# Altium PCB PX4FMUv2.4.6.PcbDoc (part 2 of 3)
Units mil, origin at the board's own origin, x right, y up, seen from the top; angles counter-clockwise.
Board outline 2756 x 1595 mil, 6 copper layers (Top, Ground, Horizontal, Vertical, Power, Bottom), stack 65.355 mil thick; 292 components, 264 nets, 1164 pads, 473 vias.
Unrouted connection lines stored in the file: 12.
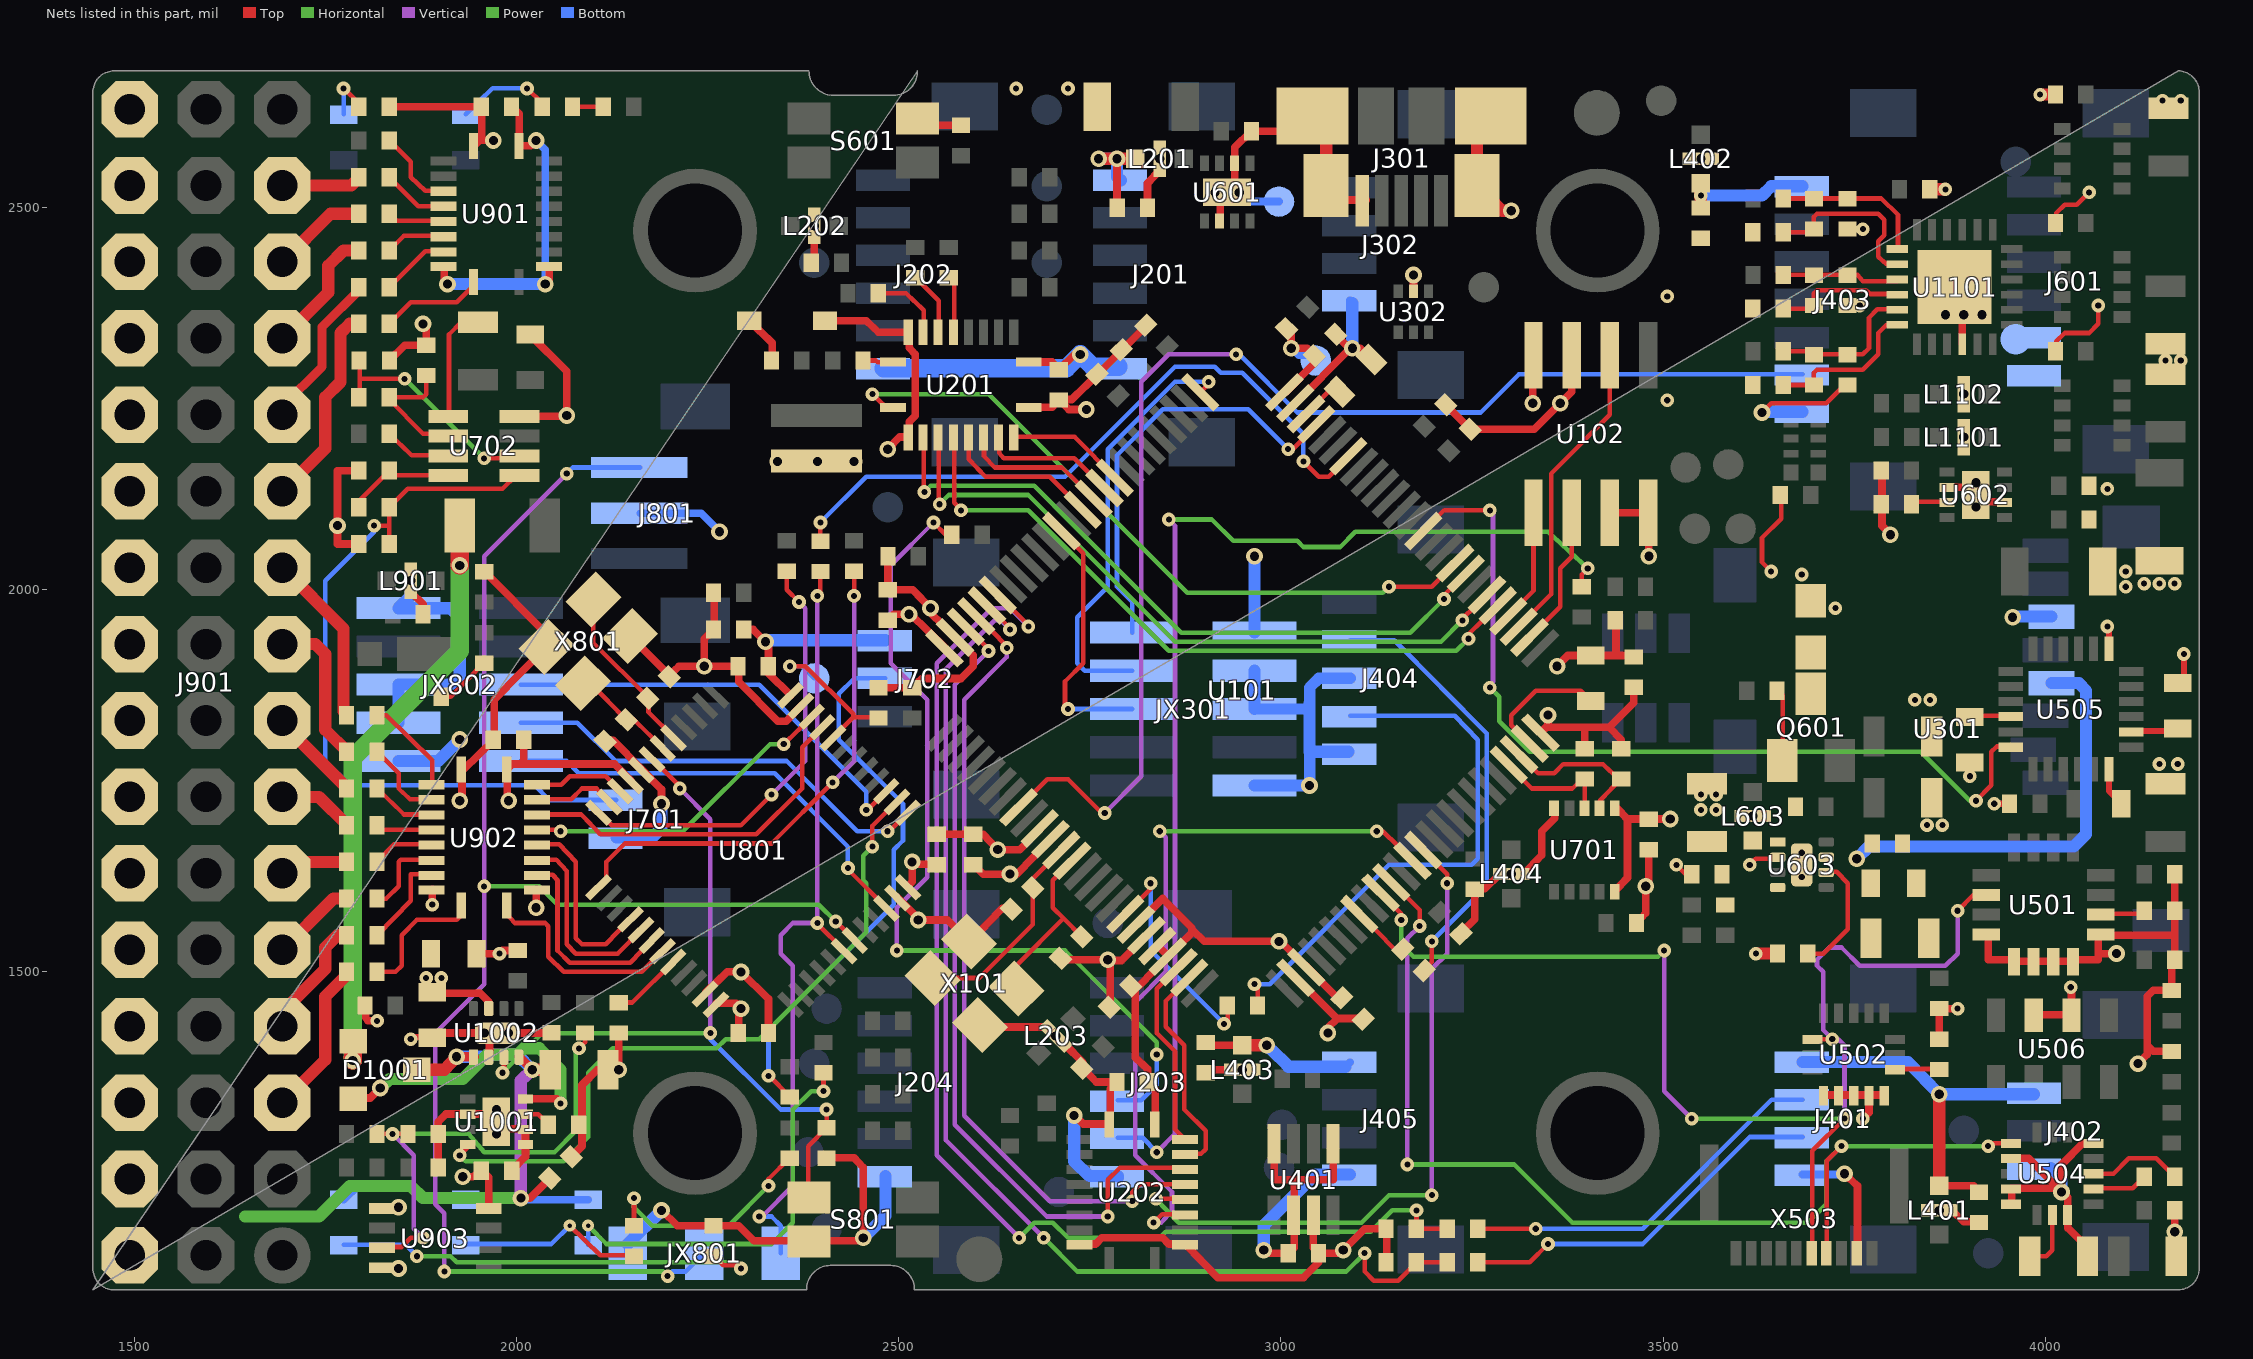
[diagram p6: the nets of this part, all layers, seen from the top]

## Via types
v1: diameter 17.84/17.84/17.84/17.84/17.84/17.84 (per signal layer), hole 8, Top to Bottom, 334 vias
v2: diameter 21.84/21.84/21.84/21.84/21.84/21.84 (per signal layer), hole 12, Top to Bottom, 129 vias
v3: diameter 15.84/15.84/15.84/15.84/15.84/15.84 (per signal layer), hole 6, Top to Bottom, 8 vias
v4: diameter 19.84/19.84/19.84/19.84/19.84/19.84 (per signal layer), hole 10, Top to Bottom, 2 vias

## Nets (pads, with @x,y where several pads share a name; then routed paths per layer and width w, separated by ;. In a path a pad name is that pad's centre, name@x,y a point inside that pad or via, vN(x,y) a via of type N, cw(c..) or ccw(c..) an arc to the next point about the centre after c; other vN are vias at no path point) (continued)
FMU-CH6-PROT: J901.31 R902.P$2 | length 268.5
  Top w16: J901.31@1693.4,2128.37 1749.4,2184.37 1749.4,2251.37 1769.4,2271.37 1769.4,2335.37 1781.4,2347.37 R902.P$2@1794.4,2347.37
FMU-I2C1_SCL: R401.P$1 R404.P$1 U101.95 | length 1631.5
  Top w6: U101.95@2629.4,1993.37 2669.4,1953.37 v1(2669.4,1951.37) ; v1(3177.4,1187.37) 3177.4,1163.37 R404.P$1@3218.4,1163.37
  Horizontal w6: v1(2657.4,1151.37) 2677.4,1171.37 2701.4,1171.37 2721.4,1151.37 2841.4,1151.37 2849.4,1159.37 3117.4,1159.37 3145.4,1187.37 v1(3177.4,1187.37)
  Vertical w6: v1(2657.4,1151.37) 2549.4,1259.37 2549.4,1903.37 2621.4,1975.37 2645.4,1975.37 v1(2669.4,1951.37)
FMU-I2C1_SDA: R402.P$1 R405.P$1 U101.96 | length 1553
  Top w6: U101.96@2615.4,1979.37 2645.4,1949.37 v1(2645.4,1947.37) ; v1(3109.4,1131.37) 3109.4,1107.37 3121.4,1095.37 3153.4,1095.37 3177.4,1119.37 R405.P$1@3218.4,1119.37
  Horizontal w6: v1(2689.4,1151.37) 2733.4,1107.37 3085.4,1107.37 v1(3109.4,1131.37)
  Vertical w6: v1(2645.4,1947.37) 2633.4,1959.37 2625.4,1959.37 2561.4,1895.37 2561.4,1279.37 v1(2689.4,1151.37)
FMU-I2C2_SCL: R306.P$1 U101.47 U701.3 | length 156.2
  Top w6: U101.47@3297.4,1770.37 3328.4,1739.37 3381.4,1739.37 3394.4,1752.37 3397.4,1752.37 U701.3@3397.4,1714.37
FMU-I2C2_SDA: R307.P$1 U101.48 U701.2 | length 206.2
  Top w6: U101.48@3311.4,1784.37 3336.4,1759.37 3357.4,1759.37 3369.4,1771.37 3421.4,1771.37 3441.4,1752.37 3445.4,1752.37 3417.4,1723.37 U701.2@3417.4,1714.37
FMU-SWCLK: JX301.4 U101.76 | length 559.4
  Top w6: U101.76@2894.4,2257.37 2905.4,2269.37 v1(2905.4,2271.37)
  Bottom w6: JX301.4@2805.4,1893.37 2743.4,1893.37 2733.4,1903.37 2733.4,1963.37 2773.4,2003.37 2773.4,2183.37 2861.4,2271.37 v1(2905.4,2271.37)
FMU-SWDIO: JX301.2 U101.72 | length 561.9
  Top w6: v1(3009.4,2183.37) 3015.4,2183.37 U101.72@3047.4,2215.37
  Bottom w6: JX301.2@2805.4,1943.37 2805.4,1983.37 2785.4,2003.37 2785.4,2175.37 2845.4,2235.37 2957.4,2235.37 v1(3009.4,2183.37)
FMU-SWO: JX301.6 U101.89 | length 339.9
  Top w6: U101.89@2713.4,2076.37 2741.4,2047.37 2741.4,1903.37 2717.4,1879.37 2717.4,1847.37 v1(2721.4,1843.37)
  Bottom w6: v1(2721.4,1843.37) JX301.6@2805.4,1843.37
FMU-UART4_RX: U101.24 U202.8 | length 288.9
  Top w6: U202.8@2874.4,1261.37 2895.4,1261.37 2901.4,1267.37 2901.4,1291.37 2873.4,1319.37 2873.4,1403.37 2849.4,1427.37 2849.4,1461.37 U101.24@2880.4,1492.37
FMU-UART4_TX: U101.23 U202.9 | length 253.3
  Top w6: U101.23@2866.4,1506.37 2837.4,1477.37 2837.4,1419.37 2861.4,1395.37 2861.4,1293.37 U202.9@2874.4,1280.37
FMU-UART7_RX: U101.38 U202.4 | length 959.3
  Top w6: v1(2833.4,1171.37) 2844.4,1182.37 U202.4@2874.4,1182.37 ; v1(3125.4,1683.37) 3133.4,1683.37 U101.38@3172.4,1645.37
  Horizontal w6: v1(2841.4,1683.37) v1(3125.4,1683.37)
  Vertical w6: v1(2833.4,1171.37) 2843.4,1171.37 2857.4,1186.37 2857.4,1211.37 2809.4,1259.37 2809.4,1459.37 2849.4,1499.37 2849.4,1675.37 v1(2841.4,1683.37)
FMU-UART7_TX: U101.39 U202.5 | length 901.9
  Top w6: v1(2836.4,1202.37) U202.5@2874.4,1202.37 ; U101.39@3185.4,1660.37 3185.4,1659.37 3186.4,1659.37 3217.4,1627.37 v1(3217.4,1615.37)
  Horizontal w6: v1(2836.4,1202.37) 2866.4,1171.37 3105.4,1171.37 3141.4,1207.37 v1(3197.4,1207.37)
  Vertical w6: v1(3197.4,1207.37) 3197.4,1503.37 3217.4,1523.37 v1(3217.4,1615.37)
FMU-UART8_RX: U101.97 U202.6 | length 1044.6
  Top w6: U101.97@2602.4,1965.37 2641.4,1925.37 v1(2641.4,1923.37) ; v1(2805.4,1199.37) 2805.4,1211.37 2815.4,1221.37 U202.6@2874.4,1221.37
  Vertical w6: v1(2641.4,1923.37) 2641.4,1911.37 2585.4,1855.37 2585.4,1311.37 2697.4,1199.37 v1(2805.4,1199.37)
FMU-UART8_TX: U101.98 U202.7 | length 1088.1
  Top w6: U101.98@2588.4,1951.37 2617.4,1921.37 v1(2617.4,1919.37) ; v1(2773.4,1179.37) 2773.4,1227.37 2789.4,1243.37 2872.4,1243.37 U202.7@2874.4,1241.37
  Vertical w6: v1(2617.4,1919.37) 2573.4,1875.37 2573.4,1299.37 2693.4,1179.37 v1(2773.4,1179.37)
FMU-USART2_CTS: U101.84 U201.9 | length 154.2
  Top w6: U201.9@2650.4,2199.37 2730.4,2199.37 U101.84@2782.4,2146.37
FMU-USART2_RTS: U101.85 U201.8 | length 178.1
  Top w6: U201.8@2631.4,2199.37 2631.4,2178.37 2637.4,2171.37 2729.4,2171.37 U101.85@2769.4,2132.37
FMU-USART2_RX: U101.87 U201.6 | length 206.4
  Top w6: U201.6@2591.4,2199.37 2591.4,2170.37 2613.4,2147.37 2697.4,2147.37 U101.87@2741.4,2104.37
FMU-USART2_TX: U101.86 U201.7 | length 192.2
  Top w6: U201.7@2611.4,2199.37 2611.4,2174.37 2625.4,2159.37 2713.4,2159.37 U101.86@2755.4,2118.37
FMU-USART3_CTS: U101.58 U201.3 | length 899.3
  Top w6: U201.3@2532.4,2199.37 2532.4,2129.37 v1(2533.4,2127.37) ; v1(3213.4,1987.37) 3213.4,1992.37 U101.58@3242.4,2021.37
  Horizontal w6: v1(2533.4,2127.37) 2541.4,2135.37 2677.4,2135.37 2869.4,1943.37 3169.4,1943.37 v1(3213.4,1987.37)
FMU-USART3_RTS: U101.59 U201.1 | length 922.3
  Top w6: v1(2465.4,2255.37) 2483.4,2238.37 U201.1@2493.4,2238.37 ; v1(3141.4,2003.37) 3197.4,2003.37 U101.59@3228.4,2035.37
  Horizontal w6: v1(2465.4,2255.37) 2617.4,2255.37 2877.4,1995.37 3133.4,1995.37 v1(3141.4,2003.37)
FMU-USART3_RX: U101.56 U201.4 | length 916.3
  Top w6: U201.4@2552.4,2199.37 2552.4,2113.37 v1(2553.4,2111.37) ; v1(3237.4,1959.37) 3237.4,1961.37 U101.56@3270.4,1993.37
  Horizontal w6: v1(2553.4,2111.37) 2565.4,2123.37 2669.4,2123.37 2861.4,1931.37 3209.4,1931.37 v1(3237.4,1959.37)
FMU-USART3_TX: U101.55 U201.5 | length 906.7
  Top w6: U201.5@2572.4,2199.37 2572.4,2113.37 v1(2581.4,2103.37) ; v1(3245.4,1935.37) 3245.4,1941.37 U101.55@3284.4,1979.37
  Horizontal w6: v1(2581.4,2103.37) 2669.4,2103.37 2853.4,1919.37 3229.4,1919.37 v1(3245.4,1935.37)
FMU-VDD_3V3: C101.P$1 C201.P$1 C202.P$1 C402.P$1 C603.P$1 C604.P$1 C606.P$1 C607.P$1 C608.P$1 C610.P$1 C612.P$1 C616.P$1 C701.P$1 C902.P$1 D602.A JX301.1 R301.P$2 R302.P$2 R303.P$2 R304.P$2 R305.P$2 R306.P$2 R307.P$2 R401.P$2 R402.P$2 R602.P$2 R604.P$2 U101.11 U101.19 U101.21 U101.22 U101.28 U101.50 U101.75 U101.100 U102.3 U102.7 U102.8 U201.2 U201.10 U201.19 U202.2 U202.10 U202.19 U301.4 U401.3 U603.7 U701.1 U701.10 U901.2 U901.10 U901.19 VDD_3V1101.P$1 | length 4153.1
  Top w6: v1(3641.4,2023.37) 3629.4,2035.37 3629.4,2067.37 3654.4,2092.37 R604.P$2@3654.4,2123.37
  Top w10: U901.19@1905.4,2423.37 1905.4,2404.37 v2(1909.4,2399.37) ; C902.P$1@1993.4,2631.37 2003.4,2622.37 2003.4,2580.37 2018.4,2580.37 v2(2025.4,2587.37) ; v2(2037.4,2399.37) 2042.4,2404.37 2042.4,2423.37 U901.2@2041.4,2423.37 ; D602.A@2403.4,2351.37 2457.4,2351.37 2473.4,2336.37 2513.4,2336.37 2513.4,2316.37 2521.4,2307.37 2521.4,2227.37 2513.4,2219.37 2513.4,2199.37 2501.4,2199.37 v2(2485.4,2183.37) ; C608.P$1@2485.4,1960.37 2493.4,1967.37 v2(2513.4,1967.37) 2515.4,1967.37 U101.100@2560.4,1923.37 ; C610.P$1@2597.4,1640.37 2610.4,1627.37 v2(2645.4,1627.37) 2654.4,1627.37 U101.11@2699.4,1673.37 ; U201.10@2670.4,2238.37 2700.4,2238.37 C201.P$1@2709.4,2248.37 ; U202.19@2737.4,1143.37 2757.4,1143.37 2765.4,1151.37 2845.4,1151.37 2853.4,1143.37 2873.4,1143.37 2874.4,1143.37 2917.4,1099.37 3029.4,1099.37 3049.4,1119.37 C402.P$1@3049.4,1131.37 ; v2(2745.4,2235.37) 2722.4,2235.37 C201.P$1@2709.4,2248.37 ; U101.19@2810.4,1561.37 2845.4,1595.37 2883.4,1557.37 2883.4,1550.37 ; R301.P$2@2824.4,2345.37 2792.4,2313.37 2760.4,2281.37 2726.4,2248.37 C201.P$1@2709.4,2248.37 ; U202.10@2835.4,1300.37 2835.4,1346.37 2825.4,1355.37 2825.4,1372.37 2809.4,1387.37 2809.4,1475.37 2803.4,1481.37 2814.4,1481.37 U101.22@2852.4,1520.37 ; U101.21@2838.4,1533.37 U101.22@2852.4,1520.37 ; U101.75@3005.4,2257.37 3044.4,2296.37 3044.4,2306.37 3034.4,2315.37 v2(3013.4,2315.37) 3013.4,2336.37 R602.P$2@3008.4,2342.37 ; U401.3@3042.4,1181.37 3042.4,1138.37 C402.P$1@3049.4,1131.37 ; C101.P$1@3080.4,1465.37 3073.4,1465.37 3033.4,1506.37 2999.4,1539.37 v2(2997.4,1539.37) 2899.4,1539.37 2885.4,1553.37 2883.4,1550.37 ; R402.P$2@3138.4,1119.37 3138.4,1163.37 3109.4,1163.37 v2(3081.4,1135.37) 3077.4,1131.37 C402.P$1@3049.4,1131.37 ; R305.P$2@3215.4,2241.37 3247.4,2209.37 3331.4,2209.37 v2(3365.4,2243.37) 3380.4,2258.37 U102.3@3380.4,2306.37 ; U101.50@3341.4,1812.37 U101.50@3339.4,1812.37 ; v2(3349.4,1835.37) 3349.4,1822.37 U101.50@3339.4,1812.37 ; R306.P$2@3397.4,1791.37 3397.4,1819.37 ; U102.7@3430.4,2100.37 U102.8@3480.4,2100.37 3481.4,2099.37 v2(3481.4,2043.37) ; U701.10@3437.4,1605.37 3453.4,1622.37 3453.4,1699.37 ; U701.1@3437.4,1714.37 3439.4,1714.37 3453.4,1699.37 ; R307.P$2@3445.4,1791.37 3445.4,1803.37 3429.4,1819.37 ; C607.P$1@3461.4,1872.37 3461.4,1851.37 3429.4,1819.37 ; v2(3509.4,1699.37) 3481.4,1699.37 3453.4,1699.37 ; U101.22@2852.4,1520.37 2883.4,1550.37 ; U101.50@3339.4,1812.37 3347.4,1819.37 3397.4,1819.37 ; 3397.4,1819.37 3429.4,1819.37
  Bottom w10: v2(2025.4,2587.37) 2037.4,2575.37 v2(2037.4,2399.37) ; v2(3013.4,2315.37) 3023.4,2306.37 3044.4,2306.37 3045.4,2304.37 VDD_3V1101.P$1@3045.4,2299.37
  Bottom w16: v2(1909.4,2399.37) v2(2037.4,2399.37) ; JX301.1@2965.4,1943.37 v2(2965.4,2043.37) ; v2(3753.4,1647.37) 3769.4,1663.37 4037.4,1663.37 4053.4,1679.37 4053.4,1867.37 4044.4,1877.37 U301.4@4008.4,1877.37
FMU-VDD_5V5: C601.P$1 C615.P$1 L603.P$2 R603.P$1 U603.1 U603.4
FMU_AUX_ADC1: R408.P$1 U101.18 | length 303.5
  Top w6: U101.18@2796.4,1575.37 2829.4,1608.37 v1(2829.4,1615.37) ; v1(2925.4,1431.37) 2930.4,1436.37 R408.P$1@2930.4,1455.37
  Bottom w6: v1(2829.4,1615.37) 2829.4,1527.37 v1(2925.4,1431.37)
FMU_AUX_ADC1_PROT: J404.4 R408.P$2 | length 726.1
  Top w6: v1(2965.4,1483.37) 2969.4,1480.37 R408.P$2@2969.4,1455.37
  Bottom w6: v1(2965.4,1483.37) 2985.4,1483.37 3141.4,1639.37 3249.4,1639.37 3257.4,1647.37 3257.4,1803.37 3227.4,1834.37 J404.4@3090.4,1834.37
FMU_AUX_ADC2: R407.P$1 U101.33 | length 76.4
  Top w6: U101.33@3103.4,1575.37 3148.4,1529.37 R407.P$1@3160.4,1529.37
FMU_AUX_ADC2_PROT: J404.2 R407.P$2 | length 576.4
  Top w6: R407.P$2@3189.4,1499.37 3187.4,1502.37 3197.4,1512.37 v1(3197.4,1539.37)
  Bottom w6: J404.2@3090.4,1933.37 3148.4,1933.37 3269.4,1811.37 3269.4,1611.37 v1(3197.4,1539.37)
FRAM_MISO: U101.53 U102.2 | length 404.3
  Top w6: U101.53@3311.4,1951.37 3353.4,1993.37 3353.4,2151.37 3430.4,2228.37 U102.2@3430.4,2306.37
FRAM_MOSI: U101.54 U102.5 | length 148.7
  Top w6: U101.54@3297.4,1965.37 3330.4,1998.37 U102.5@3330.4,2100.37
FRAM_SCK: U101.52 U102.6 | length 185.8
  Top w6: U101.52@3325.4,1937.37 3365.4,1977.37 3365.4,2027.37 3380.4,2042.37 U102.6@3380.4,2100.37
GND: B601.2 C101.P$2 C102.P$2 C103.P$1 C201.P$2 C202.P$2 C401.P$2 C402.P$2 C501.P$2 C502.P$2 C503.P$2 C504.P$2 C505.P$2 C506.P$2 C507.P$2 C508.P$2 C509.P$2 C511.P$2 C512.P$2 C513.P$2 C514.P$2 C515.P$2 C601.P$2 C602.P$1 C603.P$2 C604.P$2 C605.P$2 C606.P$2 C607.P$2 C608.P$2 C609.P$1 C610.P$2 C611.P$2 C612.P$2 C613.P$2 C614.P$2 C615.P$2 C616.P$2 C617.P$2 C618.P$2 C701.P$2 C702.P$2 C703.P$2 C704.P$2 C801.P$1 C802.P$2 C803.P$2 C804.P$2 C805.P$2 C806.P$1 C901.P$2 C902.P$2 C903.P$2 C1001.P$2 C1002.P$2 C1003.P$2 C1004.P$2 C1005.P$2 C1008.P$2 C1101.P$2 C1102.P$2 C1103.P$2 C1104.P$2 C1105.P$2 C1106.P$2 C1107.P$2 C1108.P$2 C1109.P$2 C1110.P$2 D201.A D202.A D203.A D401.A D402.A D403.A D404.A D701.A D801.A D901.A D902.A D903.A GND..P$1 GND.P$1 J201.6 J202.6 J203.6 J204.6 J301.GND J301.GND1 J301.GND2 J301.GND3 J301.GND4 J302.4 J401.4 J402.3 J403.7 J404.3 J404.5 J405.4 J601.5 J601.6 J701.2 J801.P$2 J901.3 J901.6 J901.9 J901.12 J901.15 J901.18 J901.21 J901.24 J901.27 J901.30 J901.33 J901.36 J901.39 J901.42 J901.45 J901.48 JX301.3 JX301.5 JX301.9 JX801.3 JX802.3 JX802.5 JX802.9 L201.P$3 L201.P$4 L201.P$5 L202.P$3 L202.P$4 L202.P$5 L203.P$3 L203.P$4 L203.P$5 L401.P$3 L401.P$4 L401.P$5 L402.P$3 L402.P$4 L402.P$5 L403.P$3 L403.P$4 L403.P$5 L404.P$3 L404.P$4 L404.P$5 L603.P$3 L603.P$4 L603.P$5 L901.P$3 L901.P$4 L901.P$5 L1101.P$3 L1101.P$4 L1101.P$5 L1102.P$3 L1102.P$4 L1102.P$5 R102.P$2 R403.P$1 R610.P$2 R611.P$1 R615.P$2 R616.P$2 R617.P$2 R621.1 R702.P$2 R704.P$1 R706.P$2 R708.P$1 R711.P$1 R713.P$2 R801.P$2 R802.P$2 R919.P$1 R1001.P$1 R1002.P$1 R1103.P$2 R1104.P$2 R1107.P$2 R1111.P$2 R1114.P$2 R1115.P$1 S601.B3 S801.B3 U101.10 U101.20 U101.27 U101.74 U101.99 U102.4 U201.11 U202.11 U301.6 U302.2 U401.2 U401.5 U401.8 U501.8 U501.9 U501.10 U501.11 U501.12 U501.13 U502.9 U502.10 U502.11 U502.12 U502.13 U504.5 U504.10 U504.12 U504.13 U504.16 U505.1 U505.18 U506.2 U506.3 U601.2 U601.6 U601.GND U601.P$2 U601.P$3 U602.2 U602.6 U602.GND U602.P$2 U602.P$3 U603.2 U603.GND U701.5 U702.4 U801.8 U801.23 U801.35 U801.47 U901.11 U902.11 U903.1 U903.4 U1001.2 U1001.5 U1001.6 U1001.GND U1001.P$2 U1001.P$3 U1002.2 U1002.GND U1101.P$10 U1101.P$25 X101.2 X101.4 X503.2 X801.2 X801.4 | length 11031.7
  Top w6: v1(3517.4,1639.37) 3529.4,1627.37 C615.P$2@3538.4,1627.37 ; L402.P$3@3534.4,2563.37 L402.P$5@3549.4,2563.37 L402.P$4@3565.4,2563.37 ; v1(3613.4,1639.37) 3621.4,1647.37 3648.4,1647.37 U603.2@3650.4,1649.37 ; v2(3629.4,2231.37) 3641.4,2243.37 3713.4,2243.37 3738.4,2268.37 C1110.P$2@3741.4,2268.37 ; C1109.P$2@3741.4,2372.37 3757.4,2372.37 v1(3757.4,2371.37) ; C1108.P$2@3741.4,2472.37 3761.4,2472.37 v1(3761.4,2471.37) ; L1102.P$4@3893.4,2240.37 L1102.P$5@3893.4,2255.37 L1102.P$3@3893.4,2271.37 ; C1107.P$2@4014.4,2311.37 4014.4,2324.37 4025.4,2335.37 4057.4,2335.37 4069.4,2347.37 v1(4069.4,2371.37) ; C1106.P$2@4014.4,2479.37 4014.4,2492.37 4025.4,2503.37 4041.4,2503.37 v1(4057.4,2519.37) ; C1101.P$2@4161.4,2629.37 4167.4,2629.37 v1(4177.4,2639.37)
  Top w8: v1(1861.4,1411.37) 1864.4,1414.37 C1003.P$2@1889.4,1414.37 ; v1(3901.4,1755.37) C512.P$2@3901.4,1774.37 ; v1(3933.4,1719.37) C514.P$2@3954.4,1719.37 ; v1(4081.4,1951.37) 4083.4,1950.37 U505.1@4083.4,1922.37 ; U505.18@4083.4,1765.37 4083.4,1736.37 C513.P$2@4099.4,1719.37 ; C515.P$2@4173.4,1877.37 4171.4,1877.37 4181.4,1887.37 v1(4181.4,1915.37)
  Top w10: C703.P$2@1794.4,2059.37 1765.4,2059.37 v2(1765.4,2083.37) 1765.4,2155.37 R702.P$2@1794.4,2155.37 ; C1008.P$2@1802.4,1455.37 1802.4,1439.37 1805.4,1435.37 v1(1817.4,1435.37) ; U903.4@1824.4,1113.37 1844.4,1113.37 v2(1845.4,1111.37) ; U903.1@1824.4,1190.37 1844.4,1190.37 v2(1845.4,1191.37) ; R706.P$2@1833.4,2299.37 1853.4,2319.37 C704.P$2@1881.4,2319.37 1881.4,2343.37 v2(1877.4,2347.37) ; R711.P$1@1833.4,2631.37 1954.4,2631.37 1954.4,2590.37 1944.4,2580.37 1951.4,2587.37 v2(1969.4,2587.37) ; L901.P$4@1861.4,2027.37 L901.P$5@1861.4,2011.37 1861.4,1996.37 1877.4,1980.37 D903.A@1877.4,1967.37 ; C1003.P$2@1889.4,1414.37 1895.4,1419.37 v2(1957.4,1419.37) 1964.4,1413.37 U1002.2@1964.4,1388.37 ; D901.A@1897.4,1243.37 D902.A@1897.4,1287.37 1897.4,1303.37 1907.4,1313.37 1936.4,1313.37 U1001.GND@1968.4,1313.37 ; v2(1925.4,1723.37) 1928.4,1726.37 1928.4,1764.37 1930.4,1764.37 1970.4,1803.37 1970.4,1855.37 2039.4,1925.37 2039.4,1941.37 R919.P$1@1957.4,2023.37 ; C1004.P$2@1947.4,1523.37 v1(1977.4,1523.37) 1981.4,1527.37 C1002.P$2@2001.4,1527.37 ; U1001.GND@1973.4,1288.37 1979.4,1294.37 2011.4,1294.37 2011.4,1274.37 2011.4,1257.37 C901.P$2@1993.4,1239.37 ; U1001.GND@1973.4,1303.37 U1001.GND@1968.4,1313.37 ; U1001.GND@1973.4,1319.37 U1001.GND@1968.4,1313.37 ; v2(1989.4,1419.37) 2045.4,1419.37 R1002.P$1@2045.4,1420.37 ; U702.4@2004.4,2226.37 2064.4,2226.37 v2(2065.4,2227.37) 2065.4,2285.37 C702.P$2@2017.4,2333.37 ; C1005.P$2@2071.4,1257.37 2085.4,1271.37 R1001.P$1@2085.4,1303.37 ; R1001.P$1@2081.4,1299.37 R1001.P$1@2085.4,1303.37 ; C806.P$1@2116.4,1802.37 2126.4,1802.37 2163.4,1764.37 2189.4,1738.37 v2(2189.4,1719.37) ; C1001.P$2@2129.4,1371.37 2105.4,1371.37 2085.4,1351.37 R1001.P$1@2085.4,1303.37 ; v2@2133.4,1370.37 v2(2133.4,1371.37) R802.P$2@2133.4,1420.37 ; X801.2@2148.4,1938.37 C805.P$2@2199.4,1887.37 ; v2(2189.4,1187.37) 2210.4,1167.37 2257.4,1167.37 2290.4,1167.37 2310.4,1147.37 2383.4,1147.37 2449.4,1147.37 v2(2453.4,1151.37) 2453.4,1243.37 2441.4,1256.37 C801.P$1@2405.4,1256.37 ; C805.P$2@2199.4,1885.37 C805.P$2@2199.4,1887.37 ; U801.23@2247.4,1472.37 2275.4,1499.37 v2(2293.4,1499.37) 2329.4,1464.37 C802.P$2@2329.4,1419.37 ; D801.A@2258.4,1995.37 2258.4,1947.37 2245.4,1935.37 v2(2245.4,1899.37) ; C803.P$2@2288.4,1897.37 C803.P$2@2290.4,1899.37 ; U801.47@2372.4,1847.37 2352.4,1827.37 2341.4,1827.37 2290.4,1879.37 C803.P$2@2290.4,1899.37 ; D202.A@2386.4,2427.37 2389.4,2431.37 2389.4,2460.37 L202.P$5@2389.4,2475.37 L202.P$4@2389.4,2491.37 ; B601.2@2392.4,2167.37 v2(2393.4,2167.37) ; R801.P$2@2473.4,1871.37 R713.P$2@2517.4,1871.37 2530.4,1883.37 2581.4,1883.37 2597.4,1899.37 2597.4,1913.37 2574.4,1937.37 2541.4,1969.37 v2(2541.4,1975.37) 2518.4,1999.37 C608.P$2@2485.4,1999.37 2485.4,2043.37 R611.P$1@2486.4,2043.37 ; U801.35@2497.4,1597.37 2525.4,1569.37 v2(2525.4,1567.37) 2563.4,1567.37 2592.4,1538.37 2635.4,1582.37 C102.P$2@2648.4,1582.37 ; S601.B3@2524.4,2616.37 2533.4,2607.37 C609.P$1@2581.4,2607.37 ; C804.P$2@2549.4,1679.37 C610.P$2@2597.4,1679.37 2610.4,1679.37 v2(2629.4,1659.37) 2658.4,1659.37 U101.10@2685.4,1687.37 ; X101.4@2606.4,1430.37 2609.4,1427.37 2694.4,1427.37 L203.P$5@2705.4,1415.37 ; U201.11@2670.4,2297.37 2700.4,2297.37 C201.P$2@2709.4,2287.37 2730.4,2307.37 v2(2737.4,2307.37) ; C103.P$1@2712.4,1518.37 2714.4,1515.37 v2(2773.4,1515.37) v2@2775.4,1514.37 ; L203.P$3@2717.4,1404.37 2740.4,1381.37 2740.4,1374.37 2758.4,1355.37 2786.4,1355.37 2776.4,1346.37 2776.4,1300.37 2741.4,1300.37 v2(2729.4,1311.37) ; C612.P$2@2776.4,1454.37 2776.4,1499.37 2776.4,1513.37 v2@2775.4,1514.37 ; U101.20@2824.4,1547.37 2791.4,1514.37 v2@2775.4,1514.37 ; D201.A@2825.4,2499.37 2825.4,2531.37 2841.4,2548.37 L201.P$5@2841.4,2563.37 L201.P$3@2841.4,2579.37 ; D404.A@2901.4,1368.37 2905.4,1371.37 2934.4,1371.37 L403.P$5@2949.4,1371.37 L403.P$3@2965.4,1371.37 ; U601.2@2920.4,2482.37 2920.4,2514.37 2914.4,2519.37 U601.GND@2929.4,2519.37 ; U601.P$3@2945.4,2519.37 2939.4,2525.37 U601.6@2939.4,2557.37 2939.4,2578.37 R617.P$2@2961.4,2599.37 J301.GND4@3021.4,2599.37 ; v2(2977.4,1135.37) 2981.4,1131.37 3010.4,1131.37 3017.4,1138.37 3017.4,1181.37 3017.4,1227.37 ; U401.8@2991.4,1274.37 2991.4,1227.37 3017.4,1227.37 ; U101.27@3019.4,1492.37 3073.4,1438.37 ; U101.74@3019.4,2243.37 3089.4,2314.37 v2@3089.4,2315.37 ; J301.GND4@3041.4,2619.37 J301.GND4@3059.4,2602.37 ; J301.GND3@3059.4,2529.37 3079.4,2509.37 3106.4,2509.37 J301.GND@3111.4,2509.37 ; v2(3061.4,1419.37) 3061.4,1426.37 3073.4,1438.37 ; U401.5@3068.4,1274.37 3068.4,1227.37 3017.4,1227.37 ; C606.P$2@3071.4,2333.37 v2@3089.4,2315.37 ; C101.P$2@3107.4,1438.37 3073.4,1438.37 ; C613.P$2@3118.4,2300.37 3103.4,2315.37 v2(3093.4,2315.37) v2@3089.4,2315.37 ; U302.2@3173.4,2390.37 v2(3173.4,2411.37) ; R102.P$2@3235.4,1550.37 3253.4,1568.37 3253.4,1608.37 3266.4,1608.37 3286.4,1627.37 L404.P$5@3301.4,1627.37 3317.4,1627.37 3341.4,1652.37 3341.4,1683.37 3358.4,1700.37 U701.5@3358.4,1714.37 ; J301.GND1@3256.4,2602.37 J301.GND1@3274.4,2619.37 ; v2(3329.4,2243.37) 3329.4,2305.37 U102.4@3330.4,2306.37 ; v2(3361.4,1899.37) 3375.4,1913.37 C611.P$2@3405.4,1913.37 3441.4,1913.37 ; R610.P$2@3438.4,1959.37 3438.4,1917.37 3441.4,1913.37 ; C607.P$2@3461.4,1911.37 3460.4,1913.37 3441.4,1913.37 ; R704.P$1@3465.4,1563.37 3477.4,1576.37 v2(3477.4,1611.37) 3481.4,1615.37 C701.P$2@3481.4,1660.37 ; L603.P$3@3602.4,1703.37 L603.P$5@3617.4,1703.37 L603.P$4@3633.4,1703.37 ; U502.9@3710.4,1338.37 3730.4,1338.37 3749.4,1338.37 U502.12@3769.4,1338.37 ; v2@3741.4,1235.37 v2(3737.4,1235.37) 3754.4,1219.37 X503.2@3754.4,1131.37 ; v1(3761.4,1307.37) 3769.4,1315.37 U502.12@3769.4,1337.37 U502.12@3769.4,1338.37 ; R615.P$2@3786.4,2155.37 3786.4,2111.37 3786.4,2083.37 v2(3797.4,2071.37) ; U502.13@3789.4,1338.37 U502.12@3769.4,1338.37 ; L401.P$4@3846.4,1187.37 L401.P$5@3861.4,1187.37 3877.4,1187.37 3893.4,1172.37 D401.A@3913.4,1172.37 ; C503.P$2@3857.4,1451.37 C503.P$2@3861.4,1451.37 ; C505.P$2@3865.4,1411.37 C505.P$2@3861.4,1411.37 C503.P$2@3861.4,1452.37 ; U602.6@3872.4,2133.37 3904.4,2133.37 U602.P$3@3909.4,2139.37 ; U1101.P$25@3881.4,2395.37 3881.4,2371.37 v2(3893.4,2359.37) 3891.4,2357.37 U1101.P$10@3891.4,2321.37 ; v1(3885.4,1451.37) C503.P$2@3861.4,1451.37 ; L1101.P$4@3893.4,2184.37 L1101.P$5@3893.4,2199.37 L1101.P$3@3893.4,2215.37 ; U602.GND@3909.4,2108.37 U602.GND@3915.4,2114.37 ; U602.GND@3909.4,2123.37 3915.4,2118.37 U602.GND@3915.4,2114.37 ; U501.8@3923.4,1549.37 3925.4,1549.37 3925.4,1515.37 3959.4,1515.37 3959.4,1513.37 U501.10@3985.4,1513.37 ; U602.2@3947.4,2114.37 U602.GND@3915.4,2114.37 ; U504.13@3956.4,1196.37 3956.4,1216.37 4017.4,1216.37 v2(4021.4,1211.37) ; U504.10@3956.4,1255.37 3978.4,1255.37 v2(4021.4,1211.37) ; U506.3@3985.4,1443.37 U506.2@4034.4,1443.37 ; U501.10@3985.4,1512.37 U501.10@3985.4,1513.37 ; v1(4033.4,1479.37) 4034.4,1479.37 U506.2@4034.4,1443.37 ; U506.2@4036.4,1445.37 U506.2@4034.4,1443.37 ; C509.P$2@4055.4,1127.37 4055.4,1138.37 4029.4,1164.37 4029.4,1182.37 4029.4,1204.37 v2(4021.4,1211.37) ; U504.5@4063.4,1275.37 4049.4,1275.37 4021.4,1247.37 v2(4021.4,1211.37) ; v2(4093.4,1523.37) 4069.4,1523.37 ; v2(4121.4,1379.37) 4133.4,1391.37 4133.4,1403.37 ; C401.P$2@4165.4,1395.37 4141.4,1395.37 4133.4,1403.37 ; C507.P$2@4169.4,1187.37 4169.4,1160.37 v2(4169.4,1159.37) 4171.4,1158.37 C506.P$2@4171.4,1127.37 ; C502.P$2@4169.4,1627.37 C504.P$2@4169.4,1579.37 4169.4,1547.37 ; C805.P$2@2199.4,1887.37 2212.4,1899.37 v2(2245.4,1899.37) ; v2(2245.4,1899.37) C803.P$2@2290.4,1899.37 ; C503.P$2@3861.4,1451.37 C503.P$2@3861.4,1452.37 ; C503.P$2@3861.4,1451.37 C503.P$2@3861.4,1452.37 ; U501.10@3985.4,1513.37 4010.4,1513.37 4036.4,1513.37 4036.4,1515.37 4069.4,1515.37 4069.4,1523.37 ; 4069.4,1523.37 4069.4,1549.37 4072.4,1549.37 4074.4,1547.37 4169.4,1547.37 ; 4133.4,1403.37 4133.4,1467.37 4141.4,1475.37 4165.4,1475.37 4165.4,1512.37 C508.P$2@4169.4,1515.37 4169.4,1547.37
  Top w16: v2(1957.4,1419.37) U1002.GND@1973.4,1419.37 ; C1001.P$2@2119.4,1371.37 2129.4,1371.37 v2(2133.4,1371.37) ; J301.GND4@3021.4,2599.37 J301.GND4@3041.4,2619.37 ; J301.GND3@3059.4,2529.37 J301.GND4@3059.4,2602.37 ; J301.GND1@3256.4,2602.37 3256.4,2529.37 3289.4,2495.37 v2(3301.4,2495.37) ; v1(3621.4,1523.37) C602.P$1@3650.4,1523.37 ; R1115.P$1@3849.4,2523.37 v1(3869.4,2523.37) ; C605.P$2@3851.4,1724.37 C605.P$2@3851.4,1743.37 ; C501.P$2@3851.4,1807.37 C501.P$2@3851.4,1822.37 ; v1(3993.4,2647.37) C1105.P$2@4014.4,2647.37
  Bottom w10: JX801.3@2145.4,1131.37 JX801.3@2145.4,1143.37 ; J801.P$2@2161.4,2099.37 2241.4,2099.37 v2(2265.4,2075.37) ; J203.6@2786.4,1232.37 J203.6@2789.4,1229.37 ; J201.6@2787.4,2291.37 J201.6@2790.4,2289.37 ; U601.P$3@2945.4,2519.37 2957.4,2507.37 GND..P$1@2997.4,2507.37 ; J404.5@3088.4,1787.37 J404.5@3090.4,1785.37 ; J302.4@3090.4,2378.37 J302.4@3093.4,2374.37 ; v2(3629.4,2231.37) v2@3630.4,2232.37 ; J401.4@3682.4,1234.37 3736.4,1234.37 v2(3737.4,1235.37) ; J402.3@3991.4,1242.37 3986.4,1242.37 J402.3@4007.4,1242.37
  Bottom w15: JX301.5@2965.4,1843.37 3037.4,1843.37 ; v2(3037.4,1743.37) 3037.4,1787.37 ; 3037.4,1851.37 3037.4,1871.37 3049.4,1883.37 J404.3@3090.4,1883.37
  Bottom w16: JX802.3@1845.4,1825.37 JX802.5@1845.4,1875.37 1913.4,1875.37 1925.4,1887.37 1925.4,1963.37 1913.4,1975.37 JX802.9@1845.4,1975.37 1861.4,1991.37 L901.P$5@1861.4,2011.37 ; J701.2@2130.4,1675.37 2177.4,1675.37 2189.4,1687.37 v2(2189.4,1719.37) ; JX801.3@2145.4,1143.37 v2(2189.4,1187.37) ; v2(2453.4,1151.37) 2482.4,1180.37 J204.6@2482.4,1232.37 ; v2(2729.4,1311.37) 2729.4,1251.37 2749.4,1232.37 J203.6@2786.4,1232.37 ; JX301.9@2965.4,1743.37 v2(3037.4,1743.37) ; JX301.5@2965.4,1843.37 JX301.3@2965.4,1893.37 ; v2(2977.4,1135.37) 2977.4,1167.37 3044.4,1234.37 J405.4@3090.4,1234.37 ; 3037.4,1851.37 3037.4,1843.37 3037.4,1787.37 J404.5@3088.4,1787.37 ; v2(3093.4,2315.37) J302.4@3093.4,2374.37 ; v2@3630.4,2232.37 J403.7@3682.4,2232.37 ; v2(3957.4,1963.37) 3957.4,1964.37 U301.6@4008.4,1964.37 ; J402.3@4007.4,1242.37 4021.4,1227.37 v2(4021.4,1211.37)
  Bottom w24: J202.6@2480.4,2289.37 2719.4,2289.37 v2(2737.4,2307.37) 2753.4,2291.37 J201.6@2787.4,2291.37
  other v1: 3681.4,1623.37 3681.4,1655.37 3845.4,1691.37 3865.4,1691.37 3549.4,1711.37 3569.4,1711.37 3549.4,1731.37 3569.4,1731.37 4149.4,1771.37 4173.4,1771.37 3829.4,1855.37 3849.4,1855.37 3725.4,1975.37 4105.4,2003.37 4129.4,2007.37 4149.4,2007.37 4169.4,2007.37 3681.4,2019.37 4105.4,2023.37 4081.4,2131.37 3505.4,2247.37 4157.4,2299.37 4177.4,2299.37 3505.4,2383.37 4153.4,2639.37 2653.4,2655.37 2721.4,2655.37
  other v2: 2341.4,2167.37 2441.4,2167.37 3869.4,2359.37 3917.4,2359.37
GPIO_EXT_1: J403.6 U101.8 | length 1661.5
  Top w6: U101.8@2657.4,1714.37 2694.4,1751.37 2721.4,1751.37 2765.4,1707.37 v1(2769.4,1707.37)
  Vertical w6: v1(2769.4,1707.37) 2817.4,1755.37 2817.4,2271.37 2853.4,2307.37 v1(2941.4,2307.37)
  Bottom w6: v1(2941.4,2307.37) 2945.4,2307.37 3021.4,2231.37 3261.4,2231.37 3311.4,2281.37 J403.6@3682.4,2281.37
GYRO_DRDY: U101.35 U501.6 U502.6 X503.5 | length 1623.6
  Top w6: U101.35@3130.4,1603.37 3157.4,1575.37 v1(3157.4,1567.37) ; X503.5@3695.4,1131.37 3695.4,1265.37 v1(3737.4,1307.37) ; U502.6@3696.4,1411.37 3713.4,1411.37 v1(3721.4,1411.37) ; v1(3885.4,1579.37) 3905.4,1599.37 3922.4,1599.37 U501.6@3923.4,1600.37
  Horizontal w6: v1(3157.4,1567.37) 3157.4,1535.37 3173.4,1519.37 3493.4,1519.37 v1(3501.4,1527.37) ; v1(3537.4,1307.37) v1(3737.4,1307.37)
  Vertical w6: v1(3501.4,1527.37) 3501.4,1343.37 v1(3537.4,1307.37) ; v1(3737.4,1307.37) 3737.4,1403.37 3729.4,1411.37 v1(3721.4,1411.37) 3709.4,1423.37 3709.4,1499.37 3701.4,1507.37 3701.4,1515.37 3717.4,1531.37 3733.4,1531.37 3757.4,1507.37 3869.4,1507.37 3885.4,1523.37 v1(3885.4,1579.37)
IO-!RESET: C801.P$2 S801.A1 U801.7 U1002.3 | length 1030.1
  Top w6: v1(1981.4,1367.37) 1983.4,1369.37 U1002.3@1983.4,1388.37 ; U801.7@2177.4,1778.37 2213.4,1742.37 v1(2213.4,1739.37) ; S801.A1@2383.4,1204.37 2381.4,1205.37 2381.4,1271.37 C801.P$2@2405.4,1295.37 v1(2405.4,1319.37)
  Horizontal w6: v1(1981.4,1367.37) 2033.4,1419.37 v1(2253.4,1419.37)
  Vertical w6: v1(2213.4,1739.37) 2253.4,1699.37 v1(2253.4,1419.37)
  Bottom w6: v1(2253.4,1419.37) 2253.4,1411.37 2345.4,1319.37 v1(2405.4,1319.37)
IO-!VDD_SERVO_IN_FAULT: U801.38 U1001.4 | length 919.2
  Top w6: v1(1925.4,1259.37) 1936.4,1270.37 U1001.4@1936.4,1274.37 ; v1(2465.4,1663.37) 2465.4,1690.37 U801.38@2497.4,1722.37
  Horizontal w6: v1(1925.4,1259.37) 1933.4,1251.37 2061.4,1251.37 2093.4,1283.37 2093.4,1367.37 2125.4,1399.37 2261.4,1399.37 2273.4,1411.37 2317.4,1411.37 2457.4,1551.37 2457.4,1615.37 2453.4,1619.37 2453.4,1651.37 v1(2465.4,1663.37)
IO-BOOT0: IO-BOOT1101.P$1 R801.P$1 U801.44 | length 221.8
  Top w6: v1(2357.4,1899.37) 2377.4,1899.37 2440.4,1837.37 2440.4,1832.37 ; U801.44@2414.4,1806.37 2440.4,1832.37 ; R801.P$1@2473.4,1832.37 2440.4,1832.37
  Bottom w6: v1(2357.4,1899.37) 2373.4,1899.37 IO-BOOT1101.P$1@2389.4,1883.37
IO-BOOT1: R802.P$1 U801.20 | length 94.4
  Top w6: R802.P$1@2133.4,1459.37 2151.4,1459.37 U801.20@2205.4,1513.37
IO-CH1: U801.10 U902.9 | length 122.1
  Top w6: U902.9@2026.4,1744.37 2058.4,1744.37 2069.4,1755.37 2116.4,1755.37 U801.10@2136.4,1736.37
IO-CH1-PROT: J901.28 R917.P$2 | length 228.2
  Top w16: J901.28@1693.4,2028.37 1773.4,1948.37 1773.4,1840.37 R917.P$2@1778.4,1835.37
IO-CH2: U801.11 U902.8 | length 108.6
  Top w6: U902.8@2026.4,1725.37 2071.4,1725.37 2085.4,1739.37 2104.4,1739.37 U801.11@2122.4,1722.37
IO-CH3: U801.45 U902.7 | length 475.1
  Top w6: U902.7@2026.4,1705.37 2084.4,1705.37 2109.4,1679.37 2313.4,1679.37 2373.4,1739.37 2373.4,1793.37 U801.45@2400.4,1820.37
IO-CH4: U801.46 U902.6 | length 423.1
  Top w6: U902.6@2026.4,1685.37 2056.4,1685.37 v1(2057.4,1683.37) ; v1(2349.4,1797.37) U801.46@2386.4,1833.37
  Horizontal w6: v1(2057.4,1683.37) 2217.4,1683.37 2331.4,1797.37 v1(2349.4,1797.37)
IO-CH5: U801.16 U902.5 | length 250.5
  Top w6: U902.5@2026.4,1666.37 2055.4,1666.37 2077.4,1643.37 2077.4,1543.37 2085.4,1535.37 2116.4,1535.37 U801.16@2149.4,1569.37
IO-CH6: U801.17 U902.4 | length 258
  Top w6: U902.4@2026.4,1646.37 2051.4,1646.37 2065.4,1631.37 2065.4,1535.37 2077.4,1523.37 2132.4,1523.37 U801.17@2163.4,1555.37
IO-CH7: U801.18 U902.3 | length 265.6
  Top w6: U902.3@2026.4,1626.37 2047.4,1626.37 2053.4,1619.37 2053.4,1527.37 2069.4,1511.37 2148.4,1511.37 U801.18@2177.4,1541.37
IO-CH8: U801.19 U902.1 | length 283.4
  Top w6: U902.1@1987.4,1587.37 1987.4,1574.37 1997.4,1563.37 2037.4,1563.37 2041.4,1559.37 2041.4,1519.37 2061.4,1499.37 2163.4,1499.37 U801.19@2191.4,1527.37
IO-CH8-PROT: J901.7 R905.P$2 | length 206.2
  Top w6: R905.P$2@1778.4,1496.37 R905.P$2@1778.4,1499.37
  Top w16: J901.7@1693.4,1328.37 1749.4,1384.37 1749.4,1467.37 R905.P$2@1778.4,1496.37
IO-SWCLK: JX802.4 U801.37 | length 575.5
  Top w6: v1(2485.4,1683.37) 2487.4,1683.37 U801.37@2511.4,1708.37
  Bottom w6: JX802.4@2005.4,1825.37 2079.4,1825.37 2129.4,1775.37 2353.4,1775.37 2445.4,1683.37 v1(2485.4,1683.37)
IO-SWDIO: JX802.2 U801.34 | length 575.1
  Top w6: v1(2433.4,1635.37) 2433.4,1633.37 U801.34@2483.4,1583.37
  Bottom w6: JX802.2@2005.4,1775.37 2065.4,1775.37 2081.4,1759.37 2337.4,1759.37 2433.4,1663.37 v1(2433.4,1635.37)
IO-SWO: JX802.6 U801.39 | length 570.6
  Top w6: v1(2457.4,1711.37) 2459.4,1711.37 U801.39@2483.4,1736.37
  Bottom w6: JX802.6@2005.4,1875.37 2317.4,1875.37 2457.4,1735.37 v1(2457.4,1711.37)
IO-USART1_RX: J801.P$3 JX801.2 U801.31 | length 2088.1
  Top w6: v1(2417.4,1565.37) U801.31@2442.4,1541.37
  Horizontal w6: v1(1905.4,1107.37) 2191.4,1107.37 v1(2197.4,1101.37) ; v1(1957.4,1611.37) 2029.4,1611.37 2053.4,1587.37 2395.4,1587.37 v1(2417.4,1565.37)
  Vertical w6: v1(1905.4,1107.37) 1905.4,1183.37 1893.4,1195.37 1893.4,1419.37 1957.4,1483.37 v1(1957.4,1611.37) 1957.4,2043.37 v1(2065.4,2151.37)
  Bottom w6: v1(2065.4,2151.37) 2073.4,2159.37 J801.P$3@2161.4,2159.37 ; v1(2197.4,1101.37) 2203.4,1107.37 2221.4,1107.37 JX801.2@2245.4,1131.37
IO-USART1_TX: JX801.1 R101.P$2 U801.30 | length 1031.9
  Top w6: v1(2393.4,1563.37) 2393.4,1562.37 U801.30@2428.4,1527.37 ; v1(2393.4,1991.37) 2397.4,1995.37 R101.P$2@2397.4,2024.37
  Vertical w6: v1(2317.4,1179.37) 2321.4,1179.37 2361.4,1219.37 2361.4,1507.37 2345.4,1523.37 2345.4,1547.37 2361.4,1563.37 v1(2393.4,1563.37) v1(2393.4,1991.37)
  Bottom w6: v1(2317.4,1179.37) 2333.4,1179.37 2345.4,1167.37 JX801.1@2345.4,1131.37
IO-VDD_3V3: C802.P$1 C803.P$1 C804.P$1 C901.P$1 C903.P$1 C1003.P$1 C1004.P$1 D701.C J702.1 JX802.1 U801.9 U801.24 U801.36 U801.48 U902.2 U902.10 U902.19 U903.8 U1002.7 | length 965.7
  Top w10: v1(1889.4,1587.37) U902.19@1889.4,1607.37 ; C1003.P$1@1890.93,1471.37 1952.14,1471.37 1963.4,1460.11 U1002.7@1963.4,1451.37 ; v2(1929.4,1231.37) 1942.4,1231.37 1954.4,1239.37 1963.4,1230.37 U903.8@1963.4,1190.37 ; v2(1989.4,1723.37) 1987.4,1726.37 1987.4,1764.37 1994.4,1771.37 2005.4,1771.37 ; C903.P$1@2009.4,1803.37 2009.4,1775.37 2005.4,1771.37 ; v2(2025.4,1583.37) 2025.4,1606.37 U902.2@2026.4,1607.37 ; U801.9@2149.4,1750.37 2128.4,1771.37 2005.4,1771.37 ; U801.24@2261.4,1458.37 2287.4,1458.37 v2(2293.4,1451.37) 2290.4,1448.37 C802.P$1@2290.4,1419.37 ; D701.C@2297.4,1947.37 2309.4,1947.37 v2(2325.4,1931.37) 2329.4,1928.37 2329.4,1890.37 U801.48@2358.4,1861.37 ; U801.36@2511.4,1611.37 2517.4,1617.37 v2(2517.4,1643.37) 2521.4,1640.37 C804.P$1@2549.4,1640.37
  Bottom w16: JX802.1@1845.4,1775.37 1897.4,1775.37 v2(1925.4,1803.37) ; v2(2325.4,1931.37) 2324.4,1933.37 J702.1@2482.4,1933.37
  other v1: 1881.4,1491.37 1901.4,1491.37
IO-VDD_5V5: C1001.P$1 C1005.P$1 D1001.3 LED702.A LED703.A LED705.A U1002.1 U1002.4 | length 1184.6
  Top w10: v2(2005.4,1203.37) 2017.4,1203.37 C1005.P$1@2044.4,1230.37
  Top w12: v2(1921.4,1388.37) U1002.1@1944.4,1388.37 ; U1002.4@2003.4,1388.37 v2(2020.4,1371.37)
  Top w16: D1001.3@1869.4,1371.37 1905.4,1371.37 v2(1921.4,1388.37) ; v2(2020.4,1371.37) C1001.P$1@2044.4,1371.37
  Vertical w16: v2(2005.4,1203.37) 2005.4,1357.37 v2(2020.4,1371.37)
  Power w16: 1644.4,1179.37 1741.4,1179.37 1781.4,1219.37 1861.4,1219.37 1877.4,1203.37 v2(2005.4,1203.37)
  Bottom w10: LED702.A@1773.4,1201.37 1792.4,1219.37 1857.4,1219.37 1876.4,1201.37 LED703.A@1933.4,1201.37 2003.4,1201.37 v2(2005.4,1203.37) 2008.4,1201.37 LED705.A@2093.4,1201.37 LED705.A@2092.4,1201.37
  Bottom w16: v2(1921.4,1388.37) 1958.4,1388.37 1961.4,1391.37 2000.4,1391.37 v2(2020.4,1371.37)
MAG_DRDY: U101.36 U504.9 X503.4 | length 1438.2
  Top w6: U101.36@3144.4,1617.37 3181.4,1580.37 v1(3181.4,1559.37) ; X503.4@3714.4,1131.37 3714.4,1252.37 v1(3733.4,1271.37) ; v1(3925.4,1271.37) 3929.4,1275.37 U504.9@3956.4,1275.37
  Horizontal w6: v1(3165.4,1247.37) 3305.4,1247.37 3381.4,1171.37 3689.4,1171.37 3713.4,1195.37 3713.4,1251.37 v1(3733.4,1271.37) v1(3925.4,1271.37)
  Vertical w6: v1(3165.4,1247.37) 3165.4,1543.37 v1(3181.4,1559.37)
MPU_DRDY: U101.62 U505.12 | length 1150.7
  Top w6: U101.62@3186.4,2076.37 3213.4,2103.37 v1(3273.4,2103.37) ; v1(3909.4,1723.37) 3929.4,1743.37 3929.4,1787.37 3936.4,1794.37 U505.12@3955.4,1794.37
  Horizontal w6: v1(3273.4,1871.37) 3285.4,1859.37 3285.4,1827.37 3325.4,1787.37 3837.4,1787.37 3901.4,1723.37 v1(3909.4,1723.37)
  Vertical w6: v1(3273.4,1871.37) 3273.4,1875.37 3277.4,1879.37 3277.4,2099.37 v1(3273.4,2103.37)
N$1: C103.P$2 U101.13 X101.1 | length 244.2
  Top w6: X101.1@2653.4,1477.37 2653.4,1507.37 2715.4,1569.37 ; U101.13@2727.4,1645.37 2701.4,1619.37 2701.4,1583.37 2715.4,1569.37 ; C103.P$2@2739.4,1545.37 2715.4,1569.37
N$2: C102.P$1 U101.12 X101.3 | length 273.7
  Top w6: X101.3@2544.4,1491.37 2545.4,1491.37 2605.4,1491.37 2675.4,1561.37 2675.4,1609.37 2675.4,1621.37 U101.12@2713.4,1659.37
N$3: R918.P$2 R922.P$1 | length 74.9
  Top w6: R922.P$1@1901.4,1859.37 1913.4,1859.37 R918.P$2@1957.4,1904.37
N$4: D1001.2 U1001.8 | length 402.3
  Top w10: D1001.2@1786.4,1334.37 1808.4,1334.37 v2(1821.4,1347.37) ; U1001.8@2011.4,1333.37 2052.4,1333.37 v1(2057.4,1327.37)
  Power w16: v2(1821.4,1347.37) 1833.4,1359.37 1929.4,1359.37 1961.4,1391.37 2001.4,1391.37 2009.4,1399.37 2029.4,1399.37 2057.4,1371.37 v1(2057.4,1327.37)
N$5: D201.C J201.1 L201.P$2 | length 167.8
  Top w10: v2(2785.4,2563.37) 2785.4,2500.37 D201.C@2786.4,2499.37
  Top w16: v2(2761.4,2563.37) v2(2785.4,2563.37) L201.P$2@2810.4,2563.37
  Bottom w16: v2(2761.4,2563.37) v2(2785.4,2563.37) 2785.4,2539.37 J201.1@2790.4,2535.37
N$6: C509.P$1 U504.15 | length 79.3
  Top w6: C509.P$1@3980.4,1127.37 4001.4,1127.37 4009.4,1135.37 U504.15@4009.4,1182.37
N$7: LED704.C R711.P$2 | length 67
  Top w6: v1(1773.4,2655.37) 1794.4,2635.37 R711.P$2@1794.4,2631.37
  Bottom w6: LED704.C@1773.4,2621.37 v1(1773.4,2655.37)
N$8: C613.P$1 U101.73 | length 56.7
  Top w6: U101.73@3033.4,2229.37 3062.4,2259.37 C613.P$1@3077.4,2259.37
N$9: LED705.C R712.P$2 | length 537.5
  Top w6: v1(2401.4,1343.37) R712.P$2@2401.4,1368.37
  Horizontal w6: v3(2093.4,1167.37) 2117.4,1143.37 2333.4,1143.37 2361.4,1171.37 2361.4,1319.37 2385.4,1343.37 v1(2401.4,1343.37)
  Bottom w6: LED705.C@2093.4,1142.37 v3(2093.4,1167.37)
N$10: C510.P$1 U504.2 | length 72.9
  Top w6: U504.2@4063.4,1216.37 4114.4,1216.37 C510.P$1@4130.4,1231.37
N$11: C602.P$2 U603.6 | length 159.8
  Top w6: C602.P$2@3689.4,1523.37 3709.4,1523.37 3741.4,1555.37 3741.4,1615.37 3727.4,1630.37 U603.6@3713.4,1630.37
N$12: C611.P$1 U101.49 | length 169.6
  Top w6: U101.49@3325.4,1798.37 3301.4,1822.37 3301.4,1835.37 3333.4,1867.37 3392.4,1867.37 C611.P$1@3405.4,1854.37
N$13: R707.P$2 R735.P$1 | length 41
  Top w6: R735.P$1@2073.4,2631.37 R707.P$2@2114.4,2631.37
N$14: J203.4 R215.P$2 | length 1156.3
  Top w6: v1(2545.4,2087.37) 2561.4,2071.37 R215.P$2@2570.4,2071.37
  Horizontal w6: v1(2497.4,1527.37) 2717.4,1527.37 2837.4,1407.37 v1(2837.4,1391.37)
  Vertical w6: v1(2497.4,1527.37) 2497.4,1583.37 2537.4,1623.37 2537.4,1855.37 2489.4,1903.37 2489.4,2031.37 v1(2545.4,2087.37)
  Bottom w6: J203.4@2786.4,1331.37 2817.4,1331.37 2837.4,1351.37 v1(2837.4,1391.37)
N$15: R803.P$1 U801.12 | length 570.1
  Top w6: U801.12@2108.4,1708.37 2124.4,1691.37 2293.4,1691.37 v1(2333.4,1731.37) ; R803.P$1@2353.4,2024.37 2353.4,1999.37 v1(2369.4,1983.37)
  Vertical w6: v1(2333.4,1731.37) 2377.4,1775.37 2377.4,1975.37 v1(2369.4,1983.37)
N$16: R804.P$1 U801.13 | length 663.1
  Top w6: U801.13@2108.4,1611.37 2117.4,1621.37 2117.4,1643.37 2141.4,1667.37 2333.4,1667.37 v1(2413.4,1747.37) ; v1(2441.4,1991.37) R804.P$1@2441.4,2024.37
  Vertical w6: v1(2413.4,1747.37) 2441.4,1775.37 v1(2441.4,1991.37)
N$17: C510.P$2 U504.3 | length 124.2
  Top w6: U504.3@4063.4,1235.37 4089.4,1235.37 4109.4,1255.37 4145.4,1255.37 C510.P$2@4169.4,1231.37
N$18: C806.P$2 U801.6 X801.1 | length 139.2
  Top w6: X801.1@2087.4,1877.37 2096.4,1877.37 2143.4,1829.37 2153.4,1829.37 U801.6@2191.4,1792.37
N$19: J203.5 R216.P$2 | length 1517.7
  Top w6: R216.P$2@3393.4,2003.37 3393.4,2019.37 v1(3401.4,2027.37)
  Horizontal w6: v1(2853.4,2091.37) 2909.4,2091.37 2937.4,2063.37 3021.4,2063.37 3029.4,2055.37 3077.4,2055.37 3097.4,2075.37 3349.4,2075.37 v1(3401.4,2027.37)
  Vertical w6: v1(2837.4,1263.37) 2861.4,1287.37 2861.4,2083.37 v1(2853.4,2091.37)
  Bottom w6: J203.5@2786.4,1282.37 2819.4,1282.37 v1(2837.4,1263.37)
N$20: R1001.P$2 U1001.7 | length 36.8
  Top w6: U1001.7@2011.4,1313.37 2028.4,1313.37 R1001.P$2@2042.4,1299.37
N$21: D602.C R608.P$2 | length 64.7
  Top w10: D602.C@2304.4,2351.37 2334.4,2322.37 R608.P$2@2334.4,2299.37
N$22: C805.P$1 U801.5 X801.3 | length 223.8
  Top w6: X801.3@2100.4,1986.37 2100.4,1929.37 2172.4,1858.37 2172.4,1839.37 U801.5@2205.4,1806.37
N$23: R101.P$1 U101.69 | length 892.4
  Top w6: R101.P$1@2397.4,2063.37 v1(2397.4,2087.37) ; v1(3029.4,2167.37) 3049.4,2147.37 3062.4,2147.37 U101.69@3089.4,2174.37
  Bottom w6: v1(2397.4,2087.37) 2457.4,2147.37 2717.4,2147.37 2861.4,2291.37 2913.4,2291.37 2921.4,2283.37 2949.4,2283.37 3029.4,2203.37 v1(3029.4,2167.37)
N$24: R705.P$2 R706.P$1 U702.2 | length 303.1
  Top w6: R705.P$2@1794.4,2251.37 1794.4,2275.37 ; R706.P$1@1794.4,2299.37 1794.4,2275.37 ; v1(1853.4,2275.37) 1794.4,2275.37 ; v1(1957.4,2171.37) 2001.4,2171.37 U702.2@2004.4,2175.37
  Horizontal w6: v1(1853.4,2275.37) v1(1957.4,2171.37)
N$25: R702.P$1 R703.P$2 U702.8 | length 144.4
  Top w6: R703.P$2@1794.4,2107.37 1794.4,2116.37 1833.4,2155.37 1840.4,2149.37 U702.8@1911.4,2149.37
N$26: LED701.C R735.P$2 | length 126.8
  Top w6: v1(2013.4,2655.37) 2034.4,2635.37 R735.P$2@2034.4,2631.37
  Bottom w6: LED701.C@1933.4,2621.37 1968.4,2655.37 v1(2013.4,2655.37)
N$27: C703.P$1 J701.1 R703.P$1 U702.1 | length 993
  Top w6: v1(1813.4,2083.37) 1833.4,2083.37 ; C703.P$1@1833.4,2059.37 1833.4,2083.37 ; U702.1@2004.4,2149.37 1999.4,2149.37 1981.4,2131.37 1857.4,2131.37 1833.4,2107.37 1833.4,2083.37
  Bottom w6: v1(1813.4,2083.37) 1813.4,2075.37 1749.4,2011.37 1749.4,1775.37 1781.4,1743.37 2023.4,1743.37 2042.4,1724.37 J701.1@2130.4,1724.37
N$28: R701.P$1 U702.7 | length 89.3
  Top w6: R701.P$1@1833.4,2203.37 1862.4,2175.37 U702.7@1911.4,2175.37
N$29: LED702.C R708.P$2 | length 576.2
  Top w6: R708.P$2@2257.4,1128.37 2270.4,1115.37 2289.4,1115.37 v1(2293.4,1111.37)
  Horizontal w6: v1(1869.4,1127.37) 1913.4,1127.37 1921.4,1119.37 2285.4,1119.37 v1(2293.4,1111.37)
  Bottom w6: LED702.C@1773.4,1142.37 1855.4,1142.37 v1(1869.4,1127.37)
N$30: C505.P$1 U502.14 | length 58
  Top w6: U502.14@3803.4,1372.37 C505.P$1@3861.4,1372.37
N$31: J901.10 R914.P$2 | length 161.8
  Top w16: J901.10@1693.4,1428.37 1693.4,1447.37 1749.4,1503.37 1749.4,1531.37 1765.4,1547.37 R914.P$2@1778.4,1547.37
N$32: L701.P$2 U702.5 | length 151.6
  Top w6: U702.5@1911.4,2226.37 1911.4,2333.37 1927.4,2349.37 L701.P$2@1949.4,2349.37
N$33: J401.2 R404.P$2 | length 495
  Top w6: R404.P$2@3257.4,1163.37 v1(3333.4,1163.37)
  Bottom w6: v1(3333.4,1163.37) 3473.4,1163.37 3642.4,1332.37 J401.2@3682.4,1332.37
N$34: R616.P$1 U602.7 | length 48.6
  Top w6: R616.P$1@3825.4,2111.37 3827.4,2114.37 U602.7@3872.4,2114.37
N$35: C504.P$1 U501.14 | length 59.4
  Top w6: U501.14@4072.4,1575.37 4125.4,1575.37 C504.P$1@4130.4,1579.37
N$36: C704.P$1 R705.P$1 U702.6 | length 175.8
  Top w6: C704.P$1@1881.4,2280.37 1881.4,2255.37 1877.4,2251.37 1833.4,2251.37 1833.4,2248.37 1877.4,2203.37 1908.4,2203.37 U702.6@1911.4,2200.37
N$37: J401.3 R405.P$2 | length 492.9
  Top w6: R405.P$2@3257.4,1119.37 3325.4,1119.37 v1(3349.4,1143.37)
  Bottom w6: v1(3349.4,1143.37) 3473.4,1143.37 3613.4,1283.37 J401.3@3682.4,1283.37
N$38: D902.C R901.P$2 R910.P$1 U903.3 | length 648.3
  Top w6: R910.P$1@1817.4,1287.37 v1(1837.4,1287.37) D902.C@1858.4,1287.37 ; U903.3@1824.4,1139.37 1849.4,1139.37 1861.4,1151.37 v1(1877.4,1151.37) ; v1(2081.4,1399.37) 2089.4,1407.37 R901.P$2@2089.4,1420.37
  Horizontal w6: v1(1837.4,1287.37) 1937.4,1287.37 1957.4,1263.37 2049.4,1263.37 2077.4,1291.37 2077.4,1395.37 v1(2081.4,1399.37)
  Vertical w6: v1(1837.4,1287.37) 1865.4,1259.37 1865.4,1163.37 v1(1877.4,1151.37)
N$39: R709.P$2 R736.P$1 | length 304.1
  Top w6: R736.P$1@2153.4,1167.37 v1(2153.4,1203.37) ; v1(2329.4,1219.37) 2329.4,1228.37 R709.P$2@2357.4,1256.37
  Horizontal w6: v1(2153.4,1203.37) 2153.4,1191.37 2177.4,1167.37 2277.4,1167.37 v1(2329.4,1219.37)
N$40: LED703.C R736.P$2 | length 246
  Top w6: v3(2069.4,1167.37) 2109.4,1128.37 R736.P$2@2153.4,1128.37
  Bottom w6: LED703.C@1933.4,1142.37 1935.4,1143.37 2045.4,1143.37 v3(2069.4,1167.37)
N$41: D402.C J403.1 L402.P$2 | length 171
  Top w16: D402.C@3549.4,2499.37 v1(3549.4,2515.37) L402.P$2@3549.4,2532.37
  Bottom w16: v1(3549.4,2515.37) 3629.4,2515.37 3641.4,2527.37 J403.1@3682.4,2527.37
N$42: D401.C J401.1 J402.1 L401.P$2 | length 498.6
  Top w10: L401.P$2@3861.4,1219.37 3906.4,1219.37 D401.C@3913.4,1211.37
  Top w16: L401.P$2@3861.4,1219.37 v2(3861.4,1339.37)
  Bottom w10: J402.1@3985.4,1339.37 J402.1@3986.4,1341.37
  Bottom w16: J401.1@3682.4,1381.37 3820.4,1381.37 v2(3861.4,1339.37) J402.1@3985.4,1339.37
N$43: R905.P$1 U902.20 | length 178.5
  Top w6: R905.P$1@1817.4,1499.37 1841.4,1499.37 1849.4,1507.37 1849.4,1547.37 1869.4,1567.37 1921.4,1567.37 1928.4,1574.37 U902.20@1928.4,1587.37
N$44: R914.P$1 U902.18 | length 126.2
  Top w6: R914.P$1@1817.4,1547.37 1861.4,1592.37 1861.4,1627.37 1887.4,1627.37 U902.18@1889.4,1626.37
N$45: R906.P$1 U902.17 | length 111.9
  Top w6: R906.P$1@1817.4,1595.37 1829.4,1595.37 1845.4,1611.37 1845.4,1643.37 1848.4,1646.37 U902.17@1889.4,1646.37
N$46: D1001.1 F1001.2 | length 785
  Top w24: v2(1785.4,1383.37) 1786.4,1407.37 D1001.1@1786.4,1409.37 ; v2(1925.4,2031.37) F1001.2@1925.4,2083.37 F1001.2@1926.4,2083.37
  Power w24: v2(1785.4,1383.37) 1785.4,1779.37 1925.4,1919.37 v2(1925.4,2031.37)
N$47: C1108.P$1 R1105.P$2 R1106.P$1 U1101.P$1 | length 203.4
  Top w6: R1105.P$2@3657.4,2511.37 3697.4,2511.37 3741.4,2511.37 3742.4,2511.37 3785.4,2511.37 3807.4,2490.37 U1101.P$1@3807.4,2445.37
N$48: D404.C J405.1 L403.P$2 | length 204.5
  Top w10: D404.C@2901.4,1407.37 2906.4,1403.37 L403.P$2@2949.4,1403.37
  Top w16: L403.P$2@2949.4,1403.37 v2(2981.4,1403.37)
  Bottom w10: J405.1@3084.4,1375.37 J405.1@3090.4,1381.37
  Bottom w16: v2(2981.4,1403.37) 3004.4,1381.37 3009.4,1375.37 J405.1@3084.4,1375.37
N$49: R915.P$1 U902.16 | length 81.8
  Top w6: R915.P$1@1817.4,1643.37 1839.4,1666.37 U902.16@1889.4,1666.37
N$50: C512.P$1 U505.10 | length 54.1
  Top w6: C512.P$1@3901.4,1833.37 3906.4,1834.37 U505.10@3955.4,1834.37
N$51: C515.P$1 U505.20 | length 61.6
  Top w8: U505.20@4112.4,1814.37 4161.4,1814.37 C515.P$1@4173.4,1818.37
N$52: 
N$53: R907.P$1 U902.15 | length 74.5
  Top w6: R907.P$1@1817.4,1691.37 1823.4,1685.37 U902.15@1889.4,1685.37
N$54: R1106.P$2 R1107.P$1 U1101.P$2 | length 235.6
  Top w6: R1107.P$1@3657.4,2467.37 3693.4,2467.37 3697.4,2472.37 3697.4,2487.37 3701.4,2491.37 3781.4,2491.37 3789.4,2483.37 3789.4,2463.37 3781.4,2455.37 3781.4,2435.37 3792.4,2425.37 U1101.P$2@3807.4,2425.37
N$55: C1109.P$1 R1109.P$2 R1110.P$1 U1101.P$3 | length 154.5
  Top w6: R1109.P$2@3657.4,2411.37 3697.4,2411.37 3741.4,2411.37 3754.4,2411.37 3761.4,2403.37 3805.4,2403.37 U1101.P$3@3807.4,2405.37
N$56: R1110.P$2 R1111.P$1 U1101.P$4 | length 170.9
  Top w6: R1111.P$1@3657.4,2367.37 3693.4,2367.37 3697.4,2372.37 3697.4,2387.37 3701.4,2391.37 3765.4,2391.37 3771.4,2386.37 U1101.P$4@3807.4,2386.37
N$57: J702.2 R710.P$1 | length 716.2
  Top w6: v1(2329.4,1363.37) 2330.4,1363.37 R710.P$1@2357.4,1336.37
  Bottom w6: v1(2329.4,1363.37) 2329.4,1423.37 2493.4,1587.37 2493.4,1659.37 2505.4,1671.37 2505.4,1719.37 2421.4,1803.37 2421.4,1863.37 2441.4,1883.37 J702.2@2482.4,1883.37
N$58: R916.P$1 U902.14 | length 85.8
  Top w6: R916.P$1@1817.4,1739.37 1852.4,1705.37 U902.14@1889.4,1705.37
N$59: R908.P$1 U902.13 | length 109.1
  Top w6: R908.P$1@1817.4,1787.37 1845.4,1759.37 1845.4,1739.37 1860.4,1725.37 U902.13@1889.4,1725.37
N$60: R917.P$1 U902.12 | length 128.1
  Top w6: R917.P$1@1817.4,1835.37 1829.4,1835.37 1889.4,1776.37 U902.12@1889.4,1744.37
N$61: R902.P$1 U901.20 | length 137.1
  Top w6: R902.P$1@1833.4,2347.37 1861.4,2375.37 1921.4,2375.37 1944.4,2398.37 U901.20@1944.4,2403.37
N$62: R911.P$1 U901.18 | length 91.5
  Top w6: R911.P$1@1833.4,2395.37 1880.4,2442.37 U901.18@1905.4,2442.37
N$63: R903.P$1 U901.17 | length 79.9
  Top w6: R903.P$1@1833.4,2443.37 1852.4,2462.37 U901.17@1905.4,2462.37
N$64: R912.P$1 U901.16 | length 75.5
  Top w6: R912.P$1@1833.4,2491.37 1843.4,2482.37 U901.16@1905.4,2482.37
N$65: R904.P$1 U901.15 | length 87.7
  Top w6: R904.P$1@1833.4,2539.37 1871.4,2501.37 U901.15@1905.4,2501.37
N$66: R913.P$1 U901.14 | length 110.8
  Top w6: R913.P$1@1833.4,2587.37 1861.4,2559.37 1861.4,2539.37 1880.4,2521.37 U901.14@1905.4,2521.37
N$67: R1113.P$2 R1114.P$1 U1101.P$6 | length 208.5
  Top w6: R1114.P$1@3657.4,2267.37 R1113.P$2@3697.4,2267.37 3697.4,2268.37 3697.4,2283.37 3701.4,2287.37 3761.4,2287.37 3781.4,2307.37 3781.4,2335.37 3792.4,2346.37 U1101.P$6@3807.4,2346.37
N$68: J901.34 R911.P$2 | length 208.8
  Top w6: R911.P$2@1794.4,2392.37 R911.P$2@1794.4,2395.37
  Top w12: J901.34@1693.4,2239.37 1745.4,2291.37 1745.4,2343.37 R911.P$2@1794.4,2392.37
  Top w16: J901.34@1693.4,2228.37 J901.34@1693.4,2239.37
N$69: C1110.P$1 R1112.P$2 R1113.P$1 U1101.P$5 | length 199.5
  Top w6: R1112.P$2@3657.4,2311.37 3693.4,2311.37 3697.4,2307.37 3741.4,2307.37 3742.4,2307.37 3761.4,2307.37 3769.4,2315.37 3769.4,2355.37 3780.4,2366.37 U1101.P$5@3807.4,2366.37
N$70: R201.P$1 U201.20 | length 40.6
  Top w6: R201.P$1@2453.4,2299.37 2469.4,2299.37 2472.4,2297.37 U201.20@2493.4,2297.37
N$71: J901.13 R906.P$2 | length 112.8
  Top w16: J901.13@1693.4,1528.37 1760.4,1595.37 R906.P$2@1778.4,1595.37
N$72: J901.16 R915.P$2 | length 91.2
  Top w16: J901.16@1693.4,1628.37 1708.4,1643.37 R915.P$2@1778.4,1643.37
N$73: J901.19 R907.P$2 | length 100.3
  Top w16: J901.19@1693.4,1728.37 1741.4,1728.37 R907.P$2@1778.4,1691.37
N$74: J901.22 R916.P$2 | length 124.2
  Top w16: J901.22@1693.4,1828.37 1693.4,1824.37 R916.P$2@1778.4,1739.37
N$75: J901.25 R908.P$2 | length 201.4
  Top w16: J901.25@1693.4,1928.37 1736.4,1928.37 1749.4,1915.37 1749.4,1816.37 R908.P$2@1778.4,1787.37
N$77: J901.37 R903.P$2 | length 169.1
  Top w16: J901.37@1693.4,2328.37 1753.4,2388.37 1753.4,2423.37 1773.4,2443.37 R903.P$2@1794.4,2443.37
N$78: J901.40 R912.P$2 | length 127.1
  Top w16: J901.40@1693.4,2428.37 1756.4,2491.37 R912.P$2@1794.4,2491.37
N$79: J901.43 R904.P$2 | length 105.6
  Top w16: J901.43@1693.4,2528.37 1783.4,2528.37 R904.P$2@1794.4,2539.37
N$80: Q601.C R621.2
N$81: Q601.B R620.P$1 | length 94.2
  Top w6: R620.P$1@3649.4,1867.37 3656.4,1861.37 Q601.B@3656.4,1776.37
N$82: R208.P$1 U201.18 | length 96.8
  Top w6: R208.P$1@2473.4,2387.37 2509.4,2387.37 2532.4,2365.37 U201.18@2532.4,2336.37
N$83: R202.P$1 U201.17 | length 84.8
  Top w6: R202.P$1@2521.4,2408.37 2552.4,2377.37 U201.17@2552.4,2336.37
N$84: R209.P$1 U201.16 | length 75.2
  Top w6: R209.P$1@2565.4,2408.37 2572.4,2402.37 U201.16@2572.4,2336.37